# EAGLE board Etch_a_Sketch_Back (EAGLE 9.6.2)
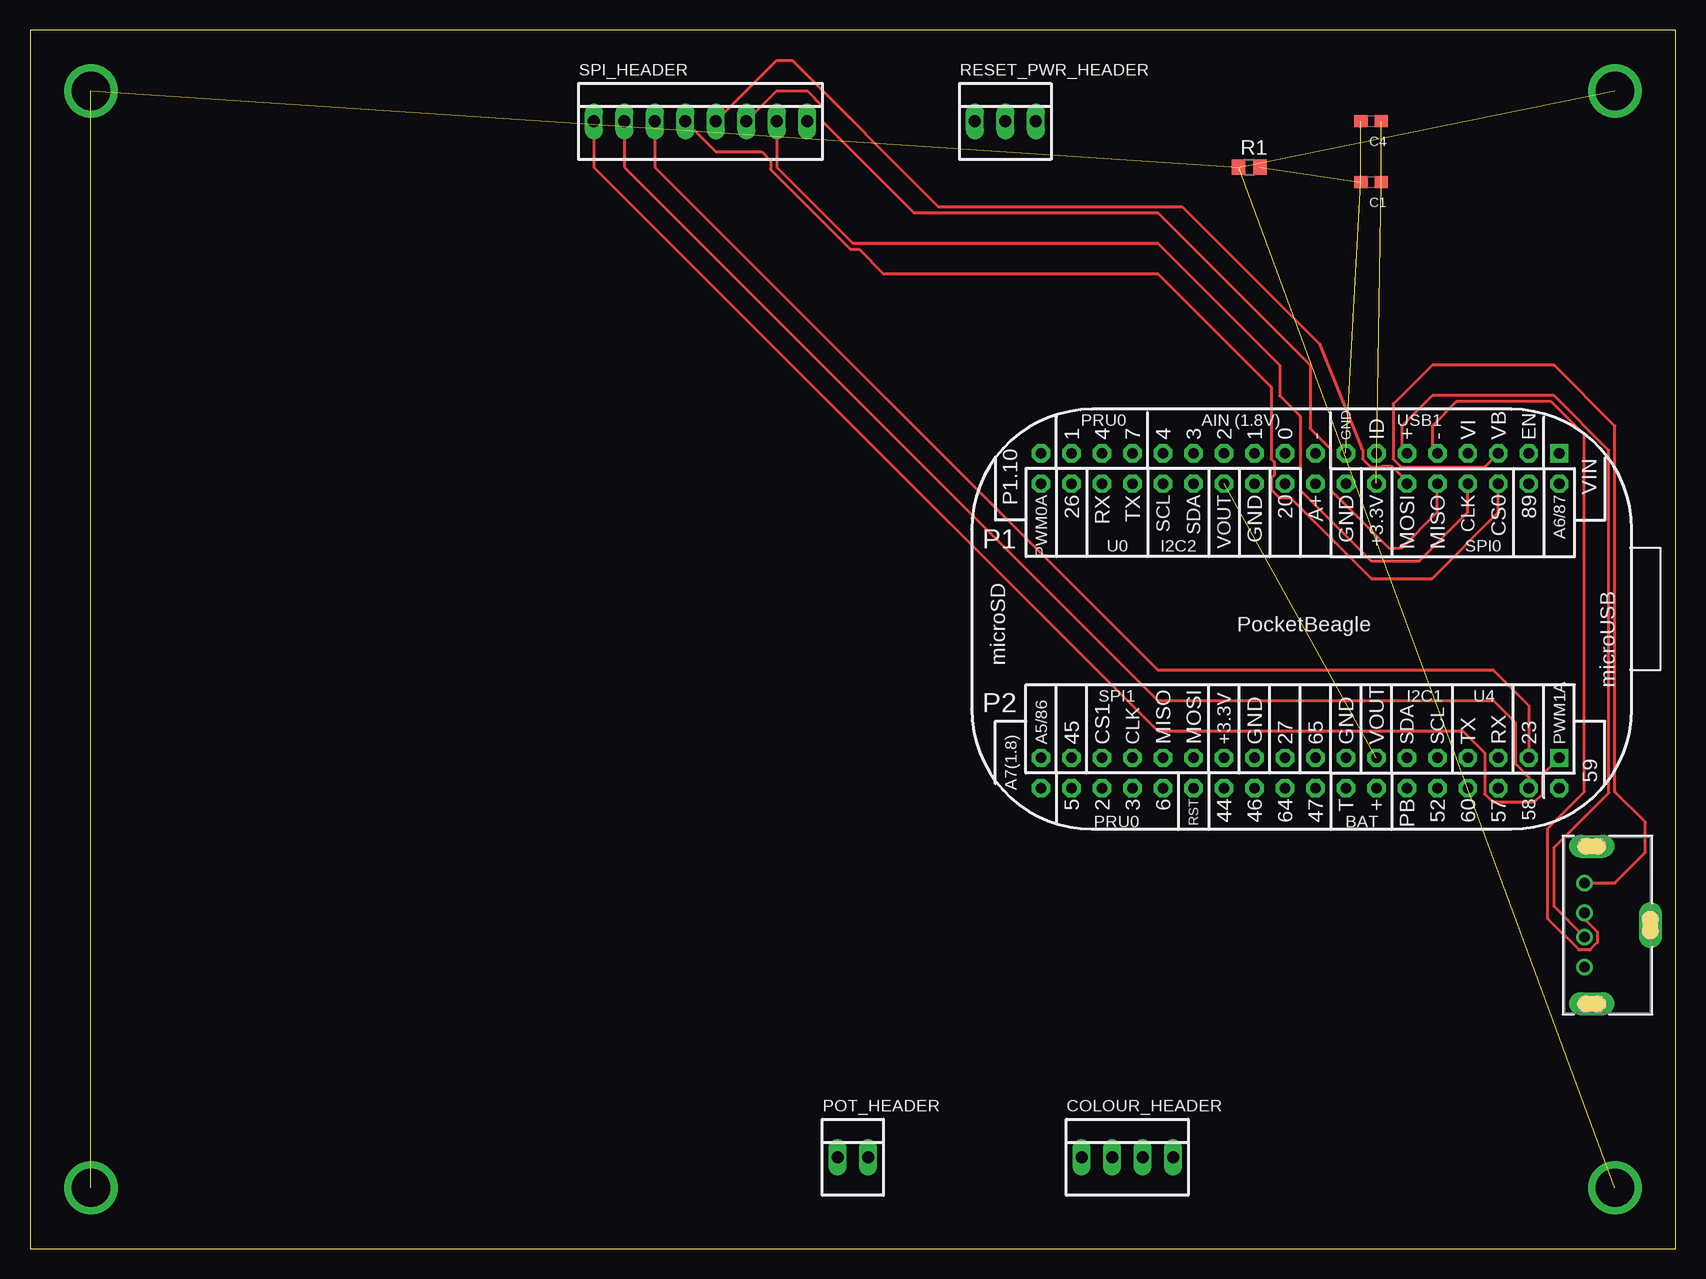
[diagram p0: board, top side]
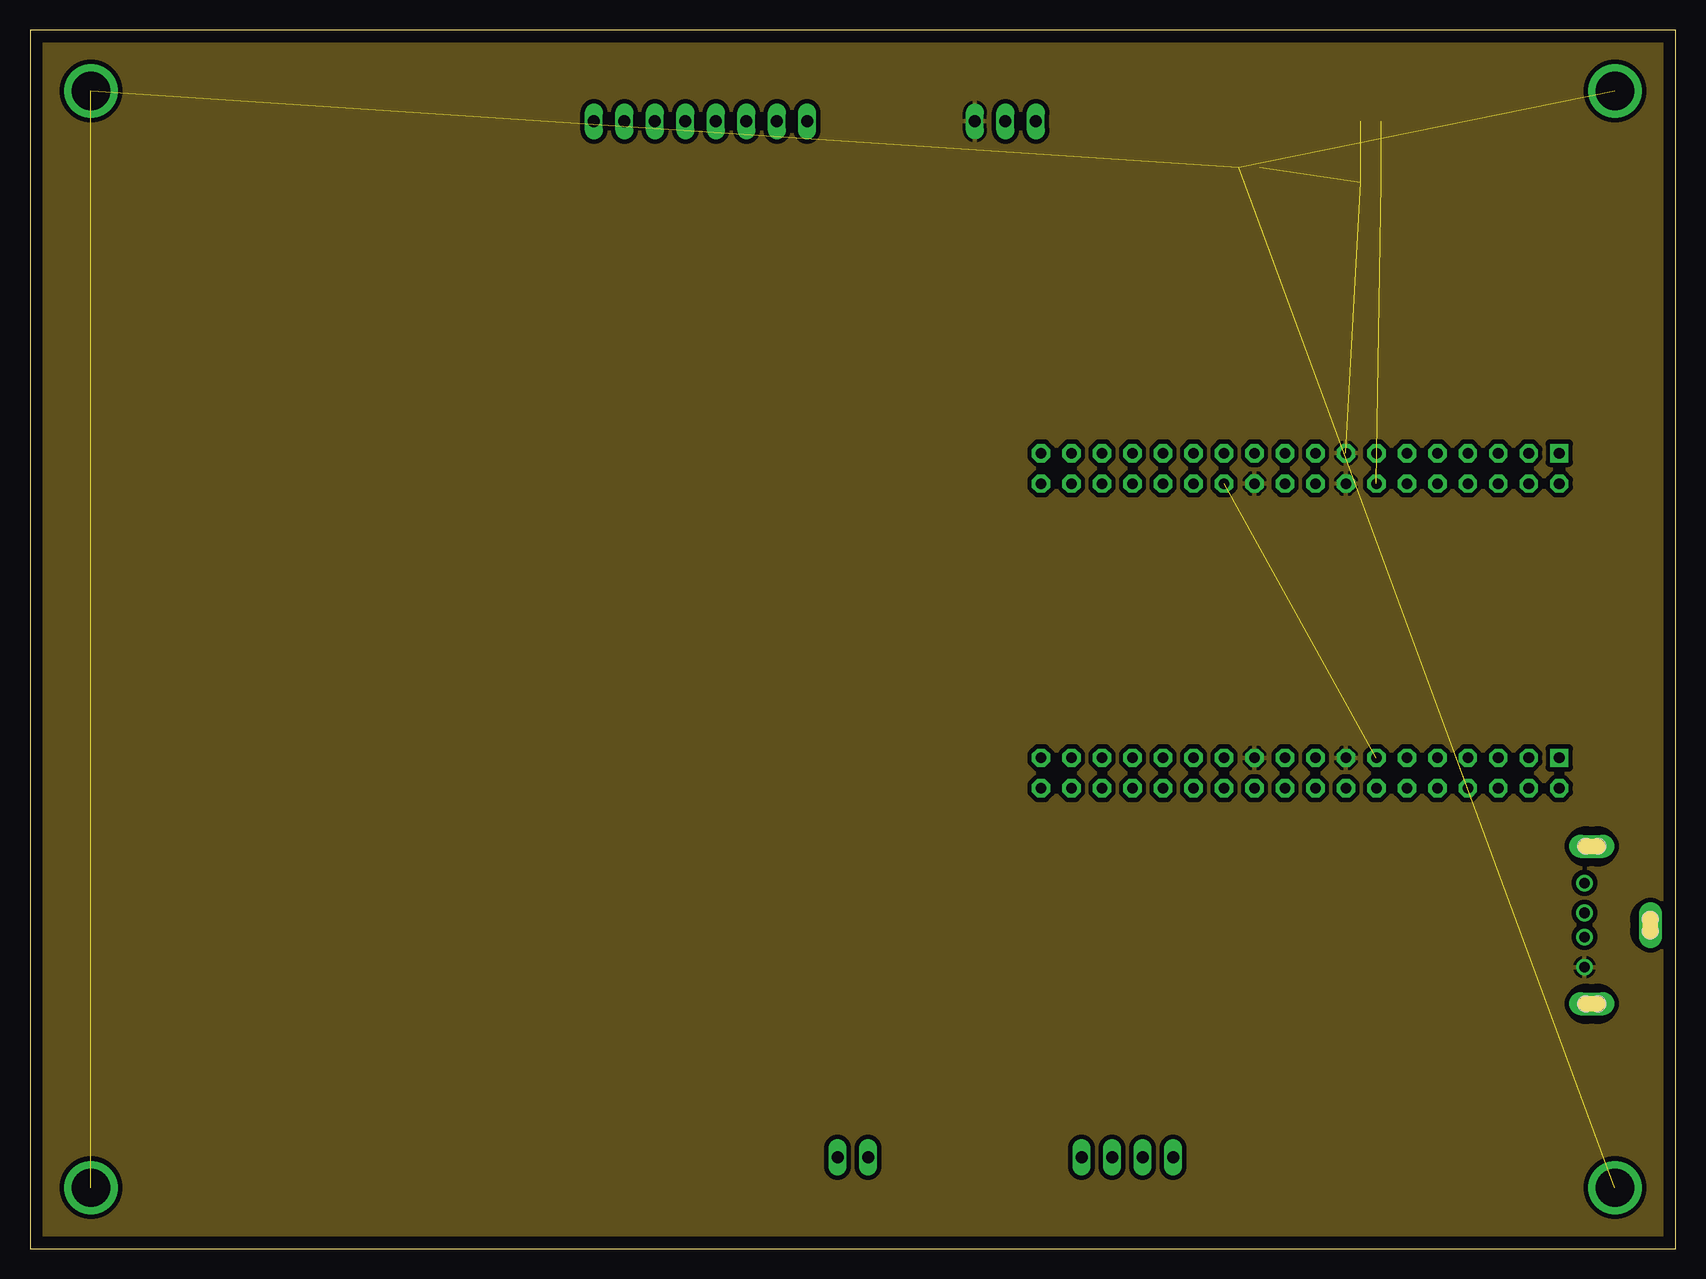
[diagram p1: board, inner layer Route2]
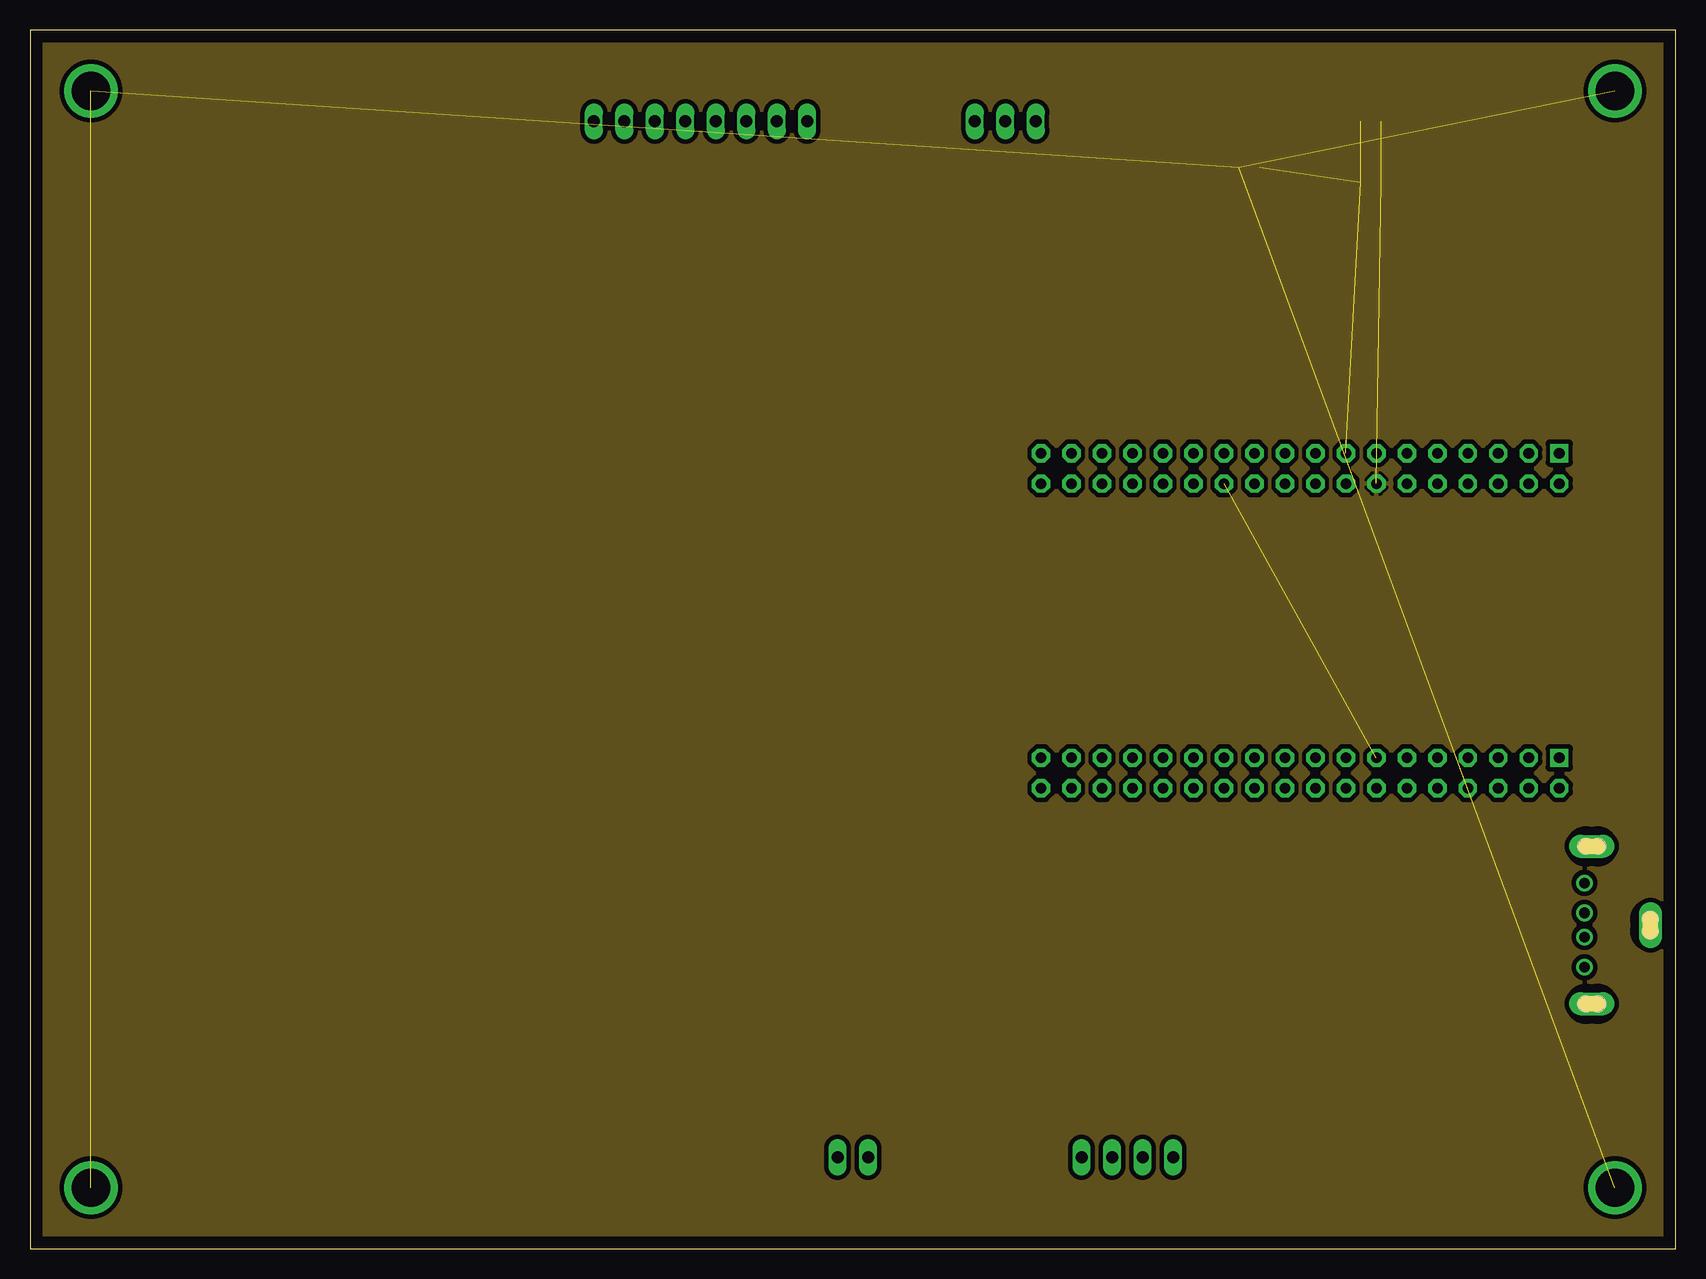
[diagram p2: board, inner layer Route15]
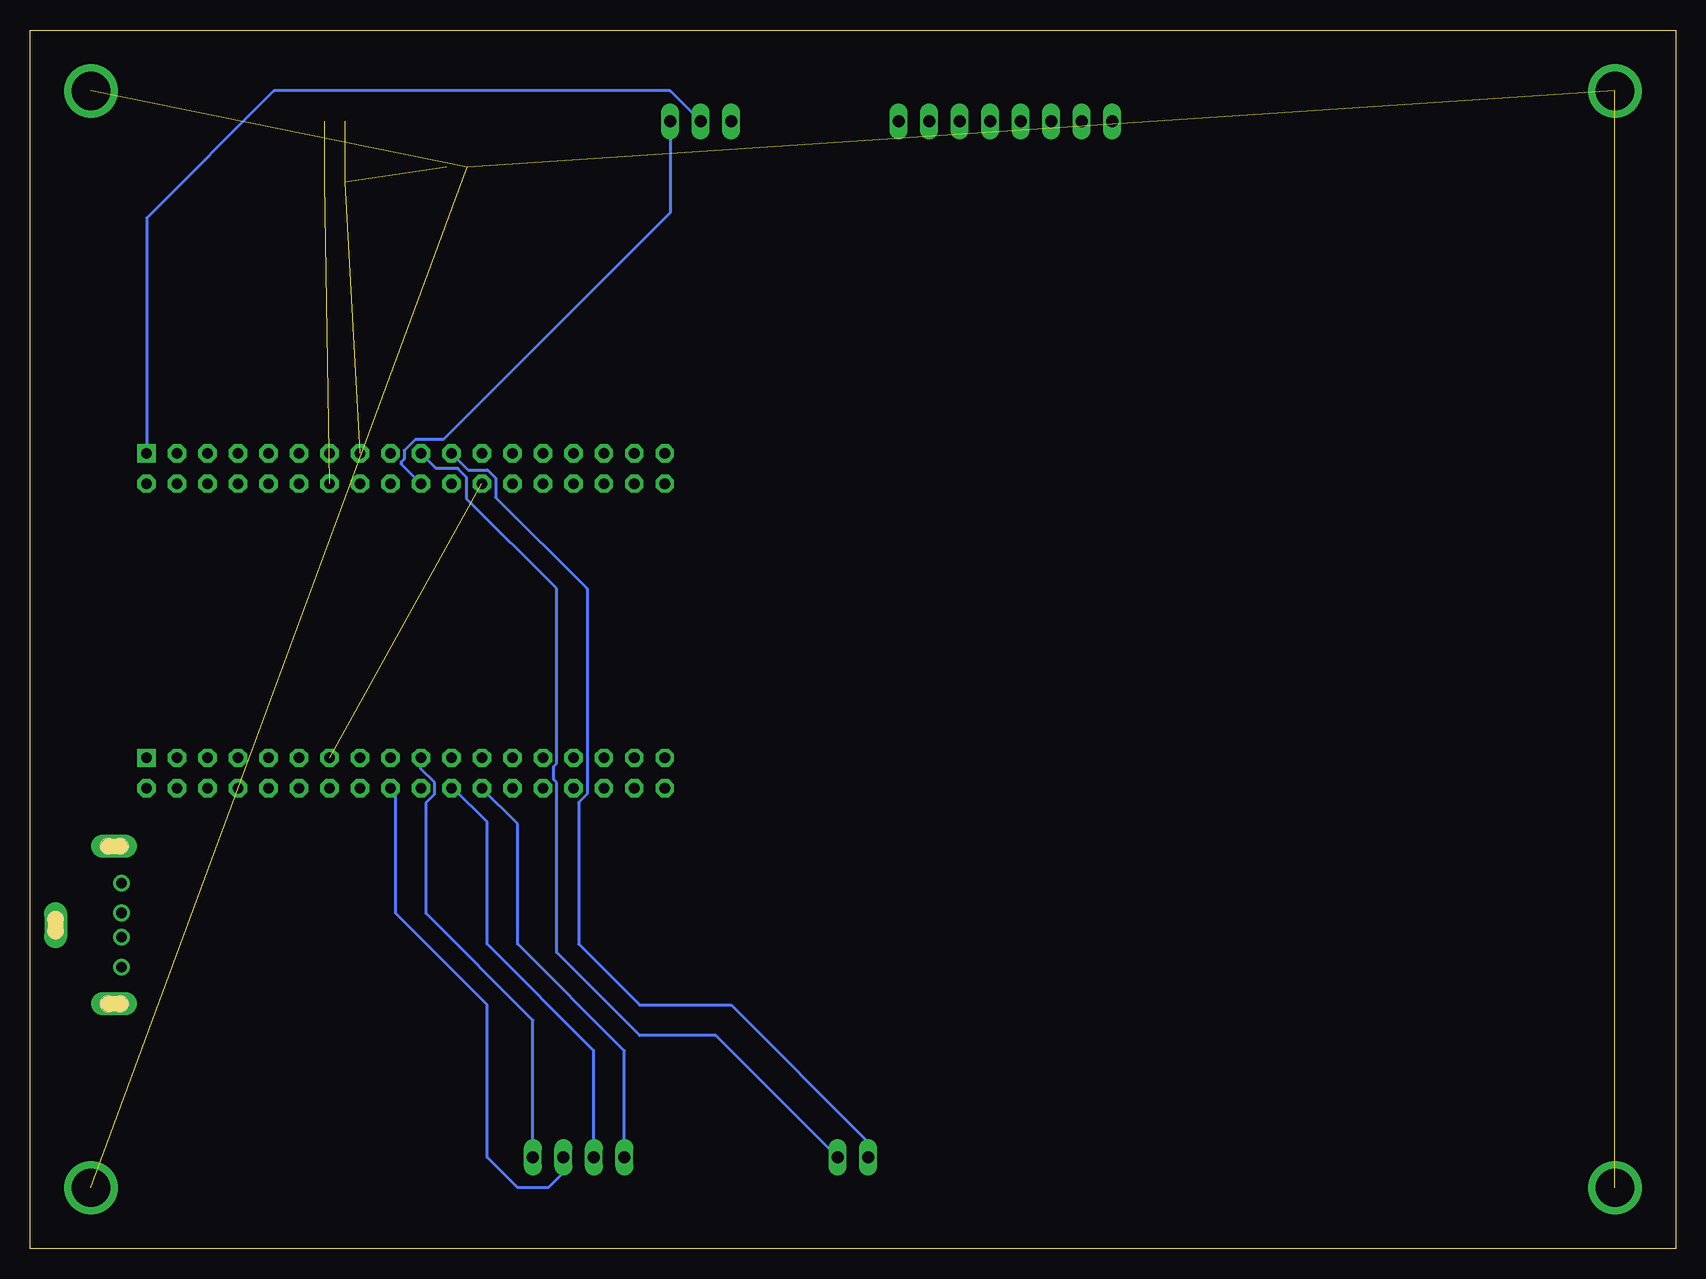
[diagram p3: board, bottom side, seen from below]

Size 137.16 x 101.6 mm. Coordinates in mm from the lower left corner, seen from the top.
Outline: 0,0 137.16,0 137.16,101.6 0,101.6 0,0
Copper layers (1+2*15+16): Top 0.035mm / dielectric 1.5mm / Route2 0.035mm / dielectric 0.15mm / Route15 0.035mm / dielectric 0.2mm / Bottom 0.035mm
Design rules "default *": minimum track width 6mil, minimum drill 0.35mm, track to track 6mil, track to pad 6mil, pad to pad 6mil, via to via 6mil, smd to smd 6mil, copper to edge 40mil, drill to drill 6mil, minimum pad ring 10mil, minimum via ring 8mil, stop-mask expansion 4mil, vias tented up to drill 0mil, thermal gap 10mil
Net classes: 0 Signal: width 0.254 mm, drill 0.305 mm, clearance 0.254 mm; 1 VCC: width 0.381 mm, drill 0.305 mm, clearance 0.381 mm; 2 GND: width 0.381 mm, drill 0.305 mm, clearance 0.381 mm

## Footprints (pad centres in the part's own frame; a part is rotated, then mirrored left to right if it is on the bottom)
C0603 = smd 1.1 x 1: 1 -0.85,0; 2 0.85,0
22-23-2041 = drill 1 long: 1 -3.81,0; 2 -1.27,0; 3 1.27,0; 4 3.81,0
MOUNTING_HOLE = drill 3.175 pad 4.445: P$1 0,0
22-23-2021 = drill 1 long: 1 -1.27,0; 2 1.27,0
R0805 = smd 1.143 x 1.27: 1 -0.889,0; 2 0.889,0
22-23-2031 = drill 1 long: 1 -2.54,0; 2 0,0; 3 2.54,0
22-23-2081 = drill 1 long: 1 -8.89,0; 2 -6.35,0; 3 -3.81,0; 4 -1.27,0; 5 1.27,0; 6 3.81,0; 7 6.35,0; 8 8.89,0
POCKETBEAGLE = drill 0.889 pad 1.524 square: P1_01 5.91,3.53; P2_01 5.91,28.93 | drill 0.889 pad 1.524 octagon: P1_02 5.91,6.07; P1_03 8.45,3.53; P1_04 8.45,6.07; P1_05 10.99,3.53; P1_06 10.99,6.07; P1_07 13.53,3.53; P1_08 13.53,6.07; P1_09 16.07,3.53; P1_10 16.07,6.07; P1_11 18.61,3.53; P1_12 18.61,6.07; P1_13 21.15,3.53; P1_14 21.15,6.07; P1_15 23.69,3.53; P1_16 23.69,6.07; P1_17 26.23,3.53; P1_18 26.23,6.07; P1_19 28.77,3.53; P1_20 28.77,6.07; P1_21 31.31,3.53; P1_22 31.31,6.07; P1_23 33.85,3.53; P1_24 33.85,6.07; P1_25 36.39,3.53; P1_26 36.39,6.07; P1_27 38.93,3.53; P1_28 38.93,6.07; P1_29 41.47,3.53; P1_30 41.47,6.07; P1_31 44.01,3.53; P1_32 44.01,6.07; P1_33 46.55,3.53; P1_34 46.55,6.07; P1_35 49.09,3.53; P1_36 49.09,6.07; P2_02 5.91,31.47; P2_03 8.45,28.93; P2_04 8.45,31.47; P2_05 10.99,28.93; P2_06 10.99,31.47; P2_07 13.53,28.93; P2_08 13.53,31.47; P2_09 16.07,28.93; P2_10 16.07,31.47; P2_11 18.61,28.93; P2_12 18.61,31.47; P2_13 21.15,28.93; P2_14 21.15,31.47; P2_15 23.69,28.93; P2_16 23.69,31.47; P2_17 26.23,28.93; P2_18 26.23,31.47; P2_19 28.77,28.93; P2_20 28.77,31.47; P2_21 31.31,28.93; P2_22 31.31,31.47; P2_23 33.85,28.93; P2_24 33.85,31.47; P2_25 36.39,28.93; P2_26 36.39,31.47; P2_27 38.93,28.93; P2_28 38.93,31.47; P2_29 41.47,28.93; P2_30 41.47,31.47; P2_31 44.01,28.93; P2_32 44.01,31.47; P2_33 46.55,28.93; P2_34 46.55,31.47; P2_35 49.09,28.93; P2_36 49.09,31.47
CONN_1050570001_MOL = drill 0.889 pad 1.295: 1 0,0; 2 2.489,0; 3 4.496,0; 4 7.01,0 | drill 0.025 pad 1.905 long: S_1 -3.073,0.61; S_2 10.058,0.61; S_3 3.505,5.486 | hole 1.295: -3.073,1.118; -3.073,0.102; 4.013,5.486; 2.997,5.486; 10.058,1.118; 10.058,0.102

## Placement (x,y rotation side)
C1  0.1µF  [C0603]  111.76,88.9 180 top
C4  10µF  [C0603]  111.76,93.98 180 top
COLOUR_HEADER  22-23-2041  [22-23-2041]  91.44,7.62 0 top
MGT1  MOUNTING_HOLE  [MOUNTING_HOLE]  132.08,96.52 0 top
MGT2  MOUNTING_HOLE  [MOUNTING_HOLE]  5.08,96.52 0 top
MGT3  MOUNTING_HOLE  [MOUNTING_HOLE]  5.08,5.08 0 top
MGT4  MOUNTING_HOLE  [MOUNTING_HOLE]  132.08,5.08 0 top
POT_HEADER  22-23-2021  [22-23-2021]  68.58,7.62 0 top
R1  100Ω  [R0805]  101.6,90.17 0 top
RESET_PWR_HEADER  22-23-2031  [22-23-2031]  81.28,93.98 0 top
SPI_HEADER  22-23-2081  [22-23-2081]  55.88,93.98 0 top
U1  POCKETBEAGLE  [POCKETBEAGLE]  133.35,69.85 180 top
USB_A_PORT  1050570001  [CONN_1050570001_MOL]  129.54,30.48 270 top

## Library data of the parts
C1 C4 = MISC
COLOUR_HEADER = Etch_a_Sketch; MF: MOLEX; MPN: 22-23-2041; OC_FARNELL: 1462920; OC_NEWARK: 38C0355
MGT1-MGT4 U1 = combo_lock
POT_HEADER = Etch_a_Sketch; MF: MOLEX; MPN: 22-23-2021; OC_FARNELL: 1462926; OC_NEWARK: 25C3832
R1 = Etch_a_Sketch
RESET_PWR_HEADER = Etch_a_Sketch; MF: MOLEX; MPN: 22-23-2031; OC_FARNELL: 1462950; OC_NEWARK: 30C0862
SPI_HEADER = Etch_a_Sketch; MF: MOLEX; MPN: 22-23-2081; OC_FARNELL: 1756826; OC_NEWARK: 01C7592
USB_A_PORT = Etch_a_Sketch; AVAILABILITY: In Stock; CHECK_PRICES: https://www.snapeda.com/parts/1050570001/Molex/view-part/?ref=eda; DESCRIPTION: USB-A (USB TYPE-A) USB 2.0 Receptacle Connector 4 Position Through Hole; MF: Molex; MP: 1050570001; PACKAGE: None; PRICE: None; PURCHASE-URL: https://www.snapeda.com/api/url_track_click_mouser/?unipart_id=2769818&manufacturer=Molex&part_name=1050570001&search_term=usb-a host; SNAPEDA_LINK: https://www.snapeda.com/parts/1050570001/Molex/view-part/?ref=snap

## Nets
3.3V: U1.P2_23
5V: RESET_PWR_HEADER.2 U1.P1_01
BAT.VIN: U1.P2_14
BTN_COLOUR: COLOUR_HEADER.4 U1.P2_19
BTN_RESET: RESET_PWR_HEADER.3 U1.P1_20
CGND [GND]: MGT1.P$1 MGT2.P$1 MGT3.P$1 MGT4.P$1 R1.1
D+: U1.P1_11 USB_A_PORT.3
D-: U1.P1_09 USB_A_PORT.2
GND [GND]: C1.2 C4.2 R1.2 RESET_PWR_HEADER.1 U1.P1_15 U1.P1_16 U1.P1_22 U1.P2_15 U1.P2_21 USB_A_PORT.4
LED_BLUE: COLOUR_HEADER.3 U1.P2_18
LED_GREEN: COLOUR_HEADER.2 U1.P2_22
LED_RED: COLOUR_HEADER.1 U1.P2_24
POT_X: POT_HEADER.2 U1.P1_19
POT_Y: POT_HEADER.1 U1.P1_21
SPI_CLK: SPI_HEADER.7 U1.P1_08
SPI_CS: SPI_HEADER.4 U1.P1_06
SPI_D/C: SPI_HEADER.3 U1.P2_03
SPI_LITE: SPI_HEADER.1 U1.P2_01
SPI_MISO: SPI_HEADER.6 U1.P1_10
SPI_MOSI: SPI_HEADER.5 U1.P1_12
SPI_RST: SPI_HEADER.2 U1.P2_04
VBUS: U1.P1_05 USB_A_PORT.1
VCC [VCC]: C1.1 C4.1 U1.P1_14
VCC_3.3V [VCC]: SPI_HEADER.8
VOUT: U1.P1_24 U1.P2_13

## Tracks (layer width: path | path; a pad name or v marks a point on that pad's centre or on a via)
5V
  Bottom 0.254: RESET_PWR_HEADER.2 83.82,96.52 116.84,96.52 127.44,85.92 U1.P1_01
BTN_COLOUR
  Bottom 0.254: COLOUR_HEADER.4 95.25,19.05 104.14,27.94 104.14,37.2 103.44,37.91 103.44,38.85 104.58,40 U1.P2_19
BTN_RESET
  Bottom 0.254: RESET_PWR_HEADER.3 83.82,86.36 102.72,67.46 105.05,67.46 105.98,66.54 105.98,65.85 106.23,65.59 106.23,65.43 U1.P1_20
CGND  (4 unrouted)
D+
  Top 0.254: USB_A_PORT.3 127,28.52 127,33.44 131.57,38.02 131.57,66.55 127,71.12 116.84,71.12 114.3,68.58 114.3,66.76 U1.P1_11
D-
  Top 0.254: USB_A_PORT.2 129.54,27.51 130.62,26.43 130.62,25.54 129.99,24.91 129.09,24.91 126.49,27.51 126.49,35.05 129.54,38.1 129.54,67.86 126.79,70.61 118.87,70.61 116.84,68.58 116.84,66.76 U1.P1_09
GND  (3 unrouted)
  pour Route2 (isolate 0.381): -5.08,106.68 142.24,106.68 142.24,-5.08 -5.08,-5.08
LED_BLUE
  Bottom 0.254: COLOUR_HEADER.3 92.71,6.35 93.98,5.08 96.52,5.08 99.06,7.62 99.06,20.32 106.68,27.94 106.68,37.94 U1.P2_18
LED_GREEN
  Bottom 0.254: COLOUR_HEADER.2 90.17,16.51 99.06,25.4 99.06,35.56 101.88,38.38 U1.P2_22
LED_RED
  Bottom 0.254: COLOUR_HEADER.1 87.63,16.51 96.52,25.4 96.52,35.4 U1.P2_24
POT_X
  Bottom 0.254: POT_HEADER.2 80.01,17.78 86.36,17.78 93.28,24.7 93.28,38.85 93.53,39.11 93.53,40.19 93.28,40.45 93.28,55.02 100.77,62.51 100.77,64.31 101.51,65.05 103.31,65.05 U1.P1_19
POT_Y
  Bottom 0.254: U1.P1_21 100.64,64.92 99.03,64.92 98.36,64.25 98.36,62.64 90.74,55.02 90.74,37.91 91.44,37.2 91.44,25.4 86.36,20.32 78.74,20.32 67.31,8.89 POT_HEADER.1
SPI_CLK
  Top 0.254: SPI_HEADER.7 62.23,90.17 68.58,83.82 93.98,83.82 104.14,73.66 104.14,71.12 105.85,69.41 105.85,63.25 111.76,57.34 115.76,57.34 119.82,61.4 U1.P1_08
SPI_CS
  Top 0.254: SPI_HEADER.4 57.15,91.44 60.96,91.44 61.72,90.68 61.72,89.96 68.37,83.31 69.09,83.31 71.12,81.28 93.98,81.28 103.44,71.82 103.44,65.85 103.69,65.59 103.69,64.51 103.44,64.25 103.44,63.31 104.11,62.64 105,62.64 111.76,55.88 116.84,55.88 122.36,61.4 U1.P1_06
SPI_D/C
  Top 0.254: SPI_HEADER.3 52.07,90.17 93.98,48.26 121.92,48.26 124.9,45.28 U1.P2_03
SPI_LITE
  Top 0.254: SPI_HEADER.1 46.99,90.17 93.98,43.18 119.38,43.18 121.22,41.34 121.22,37.91 121.89,37.24 125.37,37.24 126.04,37.91 126.04,39.52 U1.P2_01
SPI_MISO
  Top 0.254: SPI_HEADER.6 62.23,96.52 64.77,96.52 66.03,95.26 66.03,93.99 73.66,86.36 93.98,86.36 106.68,73.66 106.68,68.38 108.39,66.67 108.39,63.25 113.22,58.42 114.3,58.42 117.28,61.4 U1.P1_10
SPI_MOSI
  Top 0.254: SPI_HEADER.5 62.23,99.06 63.5,99.06 75.69,86.87 96.01,86.87 107.42,75.46 110.97,66.69 111.06,66.6 111.06,65.85 111.73,65.18 112.67,65.18 112.73,65.23 113.49,65.23 114.74,63.98 U1.P1_12
SPI_RST
  Top 0.254: SPI_HEADER.2 49.53,90.17 93.98,45.72 121.92,45.72 123.76,43.88 123.76,40.45 124.9,39.3 U1.P2_04
VBUS
  Top 0.254: USB_A_PORT.1 132.08,30.48 134.62,33.02 134.62,35.56 132.08,38.1 132.08,68.58 127,73.66 116.84,73.66 113.6,70.42 113.6,65.85 114.27,65.18 121.22,65.18 U1.P1_05
VCC  (2 unrouted)
  pour Route15 (isolate 0.381, rank 2): -7.62,-7.62 -7.62,109.22 144.78,109.22 144.78,-7.62
VOUT  (1 unrouted)